# Altium PCB PCB.pcbdoc
Units mm, origin at the board's own origin, x right, y up, seen from the top; angles counter-clockwise.
Board outline 58.46 x 127.11 mm, 2 copper layers (Top Layer, Bottom Layer); 33 components, 53 nets, 160 pads, 40 vias.
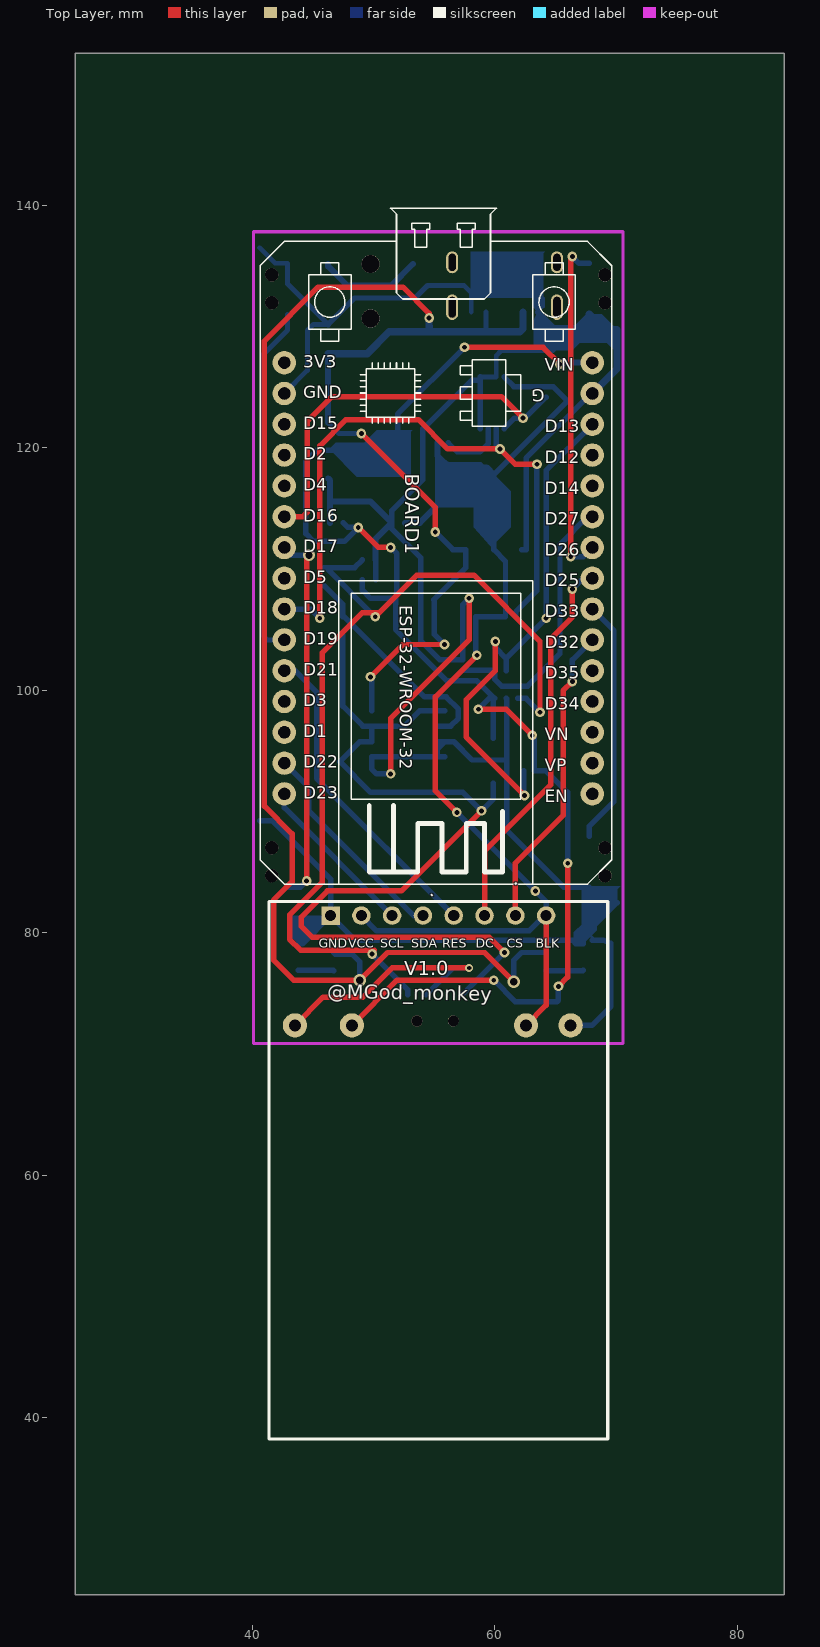
[diagram p0: Top Layer view]
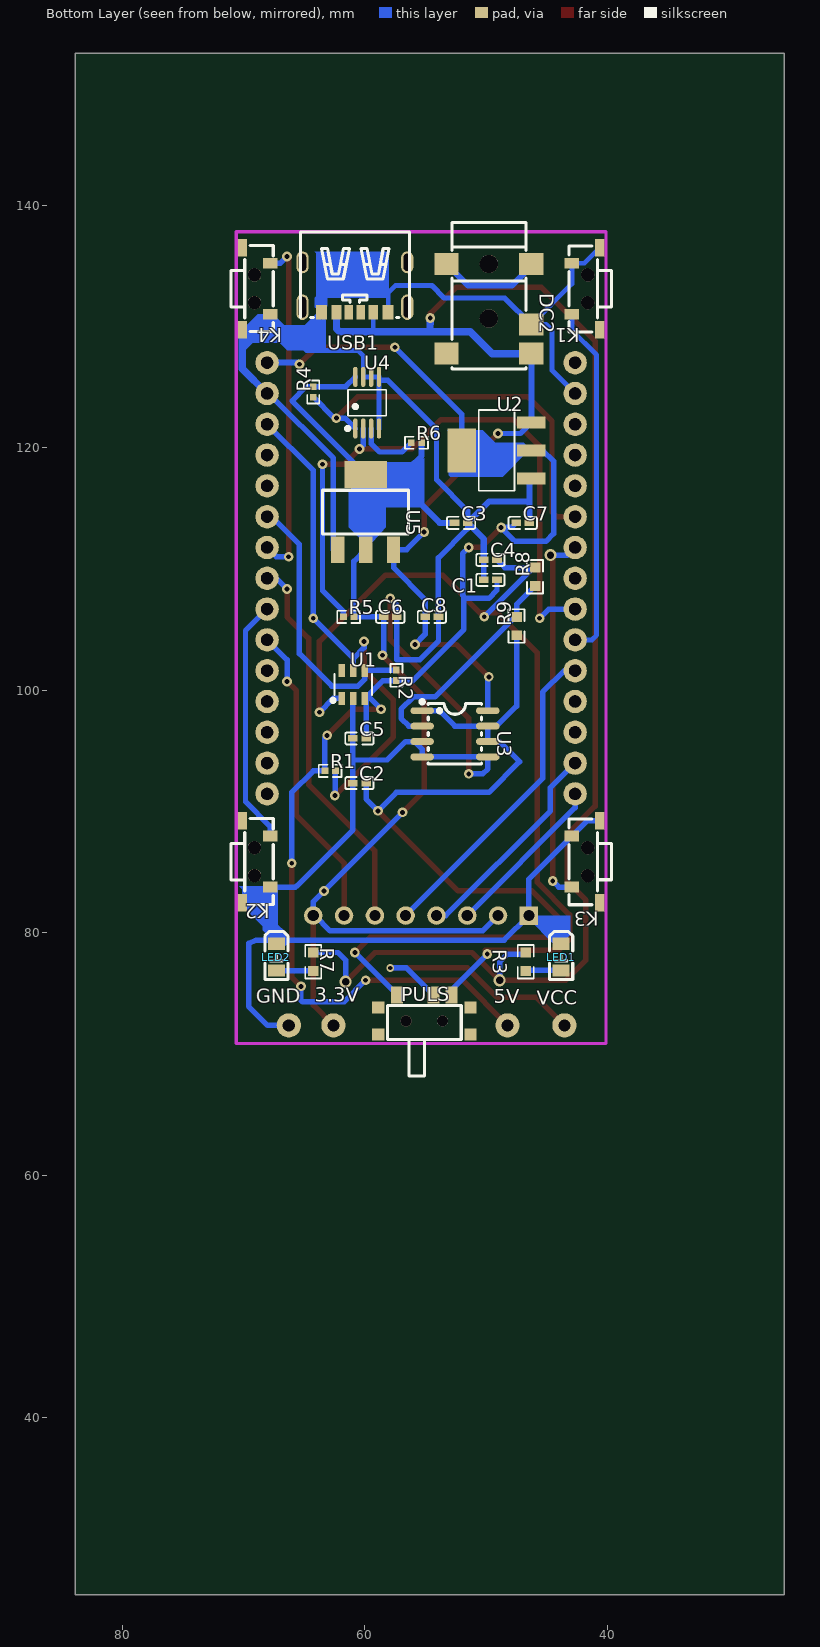
[diagram p1: Bottom Layer view, seen from below]

## Layer stack, top to bottom
Top Layer: signal copper (thickness not stored)
Dielectric: dielectric 0.32, FR-4, Dk 4.8
Bottom Layer: signal copper (thickness not stored)

## Board outline
83.856,25.4 25.4,25.4 25.4,152.514 83.856,152.514

## Components (designator, comment, footprint, x,y, rotation, side; value= is the part's Value field where it differs from the comment)
. "1.44TFT128X128" 1.44TFT128X128 46.45,81.407 r0 top
BOARD1 "ESP32DEVKITV1" ESP32-DEVKITV1 42.64,127 r270 top
C1 "100nF" C0402 49.625,109.093 r180 bottom
C2 "100nF" C0402 60.42,92.329 r0 bottom
C3 "100nF" C0402 52.038,113.792 r0 bottom
C4 "100nF" C0402 49.625,110.744 r0 bottom
C5 "100nF" C0402 60.42,96.012 r0 bottom
C6 "100nF" C0402 57.88,106.045 r180 bottom
C7 "100nF" C0402 46.958,113.792 r0 bottom
C8 "100nF" C0402 54.451,106.045 r180 bottom
DC2 "DC-098-165A" DC-IN-TH_DC-098-165A 49.752,131.445 r90 bottom
K1 "KH-3635-CAJ" SW-SMD_KH-3635-CAJ 41.751,133.096 r270 bottom
K2 "KH-3635-CAJ" SW-SMD_KH-3635-CAJ 68.929,85.852 r90 bottom
K3 "KH-3635-CAJ" SW-SMD_KH-3635-CAJ 41.751,85.852 r270 bottom
K4 "KH-3635-CAJ" SW-SMD_KH-3635-CAJ 68.929,133.096 r90 bottom
LED1 "17-21SYGC/S530-E3/TR8" LED0805-RD 43.783,77.978 r90 bottom
LED2 "17-21SURC/S530-A2/TR8" LED0805-RD 67.278,77.978 r90 bottom
PULS "SK-3296S-01-L1" SW-SMD_3P-P1.50_L2.7-W6.6 55.073,73.238 r0 bottom
R1 "10K" R0402 62.833,93.345 r0 bottom
R2 "10K" R0402 57.372,101.219 r90 bottom
R3 "10K" R0603 46.704,77.597 r270 bottom
R4 "4.7K" R0402 64.23,124.587 r270 bottom
R5 "4.7K" R0402 61.309,106.045 r0 bottom
R6 "4.7K" R0402 55.721,120.396 r0 bottom
R7 "100K" R0603 64.23,77.597 r270 bottom
R8 "10K" R0603 45.942,109.347 r270 bottom
R9 "100K" R0603 47.466,105.283 r270 bottom
U1 "MCP4726A0T-E/CH" SOT-23-6_L2.9-W1.6-P0.95-LS2.8-BL 60.928,100.457 r0 bottom
U2 "AMS1117-5.0_C473812" SOT-223-3_L6.5-W3.4-P2.30-LS7.0-BR 49.117,119.761 r0 bottom
U3 "LM358DT" SOIC-8_L5.0-W4.0-P1.27-LS6.0-BL 52.546,96.393 r90 bottom
U4 "TMP75AIDGKR" VSSOP-8_L3.0-W3.0-P0.65-LS5.0-BL 59.785,123.698 r0 bottom
U5 "AMS1117-3.3_C347222" SOT-223_L6.7-W3.5-P2.30-BR 59.912,114.681 r90 bottom
USB1 "KH-TYPE-C-6P" TYPE-C-SMD_TYPE-C-31-M-16 60.801,133.223 r180 bottom

## Footprints (in the part's own frame and the unit in brackets; to place one, negate y for a bottom-side part, rotate by r counter-clockwise, add the part's x,y. Pads: shape width x height; smd on the part's side, far side on the other; paste and mask are expansions set on the pad)
1.44TFT128X128 [mil]
  rect 60x60 hole 36: 1(0,0)
  round 60 hole 36: 2(100,0) 3(200,0) 4(300,0) 5(400,0) 6(500,0) 7(600,0) 8(700,0)
  silkscreen extent -200,-1700 900,45
C0402 [mm]
  rect 0.79x0.54 smd: 1(0.545,0) 2(-0.545,0)
  silkscreen extent -1.17,-0.5 1.17,0.5
DC-IN-TH_DC-098-165A [mm]
  rect 1.8x2 smd: 1(-3.7,-3.5) 2(-1.3,-3.5) 3(-3.7,3.5) 4(3.7,-3.5) 4(3.7,3.5)
  round 1.5 hole 1.5 unplated: ""(-0.8,0) ""(3.7,0)
  silkscreen extent -4.95,-3.05 7.11,3.05
ESP32-DEVKITV1 [mil]
  round 76 hole 39.36: 3V3(0,0) D1(1200,0) D2(300,0) D3(1100,0) D4(400,0) D5(700,0) D12(300,1000) D13(200,1000) D14(400,1000) D15(200,0) D16(500,0) D17(600,0) D18(800,0) D19(900,0) D21(1000,0) D22(1300,0) D23(1400,0) D25(700,1000) D26(600,1000) D27(500,1000) D32(900,1000) D33(800,1000) D34(1100,1000) D35(1000,1000) EN(1400,1000) GND(100,1000) GND@1(100,0) VIN(0,1000) VN(1200,1000) VP(1300,1000)
  silkscreen extent -502,-79 1693,1063
LED0805-RD [mm]
  rect 1x1.4 smd: 1(1.1,0) 2(-1.1,0)
  silkscreen extent -1.85,-0.95 2.1,0.95
R0402 [mm]
  rect 0.566x0.54 smd: 1(0.433,0) 2(-0.433,0)
  silkscreen extent -0.94,-0.5 0.94,0.5
R0603 [mm]
  rect 0.806x0.864 smd: 1(0.753,0) 2(-0.753,0)
  silkscreen extent -1.39,-0.66 1.39,0.66
SOIC-8_L5.0-W4.0-P1.27-LS6.0-BL [mil]
  oval 22.38x76.78 smd: 1(75,106.5) 2(25,106.5) 3(-25,106.5) 4(-75,106.5) 5(-75,-106.5) 6(-25,-106.5) 7(25,-106.5) 8(75,-106.5)
  silkscreen extent -98,-87 110,112
SOT-23-6_L2.9-W1.6-P0.95-LS2.8-BL [mm]
  rect 0.532x1.072 smd: 1(0.95,1.149) 2(0,1.149) 3(-0.95,1.149) 4(-0.95,-1.149) 5(0,-1.149) 6(0.95,-1.149)
  silkscreen extent -1.54,-0.89 1.82,1.45
SOT-223-3_L6.5-W3.4-P2.30-LS7.0-BR [mm]
  rect 2.34x0.98 smd: 1(-2.87,2.3) 2(-2.87,0) 3(-2.87,-2.3)
  rect 2.34x3.6 smd: 4(2.87,0)
  silkscreen extent -1.47,-3.33 1.47,3.33
SOT-223_L6.7-W3.5-P2.30-BR [mm]
  rect 2.2x1.1 smd: 1(-3.099,2.3) 2(-3.099,0) 3(-3.099,-2.3)
  rect 2.2x3.5 smd: 4(3.099,0)
  silkscreen extent -1.8,-3.55 1.8,3.55
SW-SMD_3P-P1.50_L2.7-W6.6 [mm]
  rect 1x1 smd: 0(-3.8,-0.575) 0(-3.8,1.625) 0(3.8,-0.575) 0(3.8,1.625)
  rect 1x1.4 smd: 1(2.25,-1.625) 2(-0.75,-1.625) 3(-2.25,-1.625)
  round 0.9 hole 0.9 unplated: ""(-1.5,0.525) ""(1.5,0.525)
  silkscreen extent -3.05,-0.75 3.05,5.05
SW-SMD_KH-3635-CAJ [mm]
  rect 0.9x1.2 smd: 1(2.1,-1.15) 2(-2.1,-1.15)
  rect 1.45x0.8 smd: 3(3.375,1.15) 4(-3.375,1.15)
  round 1.1 hole 1.1 unplated: ""(-1.15,0.15) ""(1.15,0.15)
  silkscreen extent -3.53,-1.4 3.55,2.1
TYPE-C-SMD_TYPE-C-31-M-16 [mm]
  oval 1x2.1 hole 0.6 slot 1.7 at 90 deg: 1(4.32,-1.65) 2(-4.32,-1.65)
  oval 1x1.8 hole 0.6 slot 1.4 at 90 deg: 3(4.32,2.05) 4(-4.32,2.05)
  rect 0.7x1.2 smd: A5(0.5,-2.05) B5(-0.5,-2.05)
  rect 0.8x1.2 smd: A9(-1.52,-2.05) B9(1.52,-2.05)
  rect 0.9x1.2 smd: A12(-2.75,-2.05) B12(2.75,-2.05)
  silkscreen extent -4.5,-2.49 4.5,4.55
VSSOP-8_L3.0-W3.0-P0.65-LS5.0-BL [mm]
  oval 0.364x1.662 smd: 1(0.975,2.131) 2(0.325,2.131) 3(-0.325,2.131) 4(-0.975,2.131) 5(-0.975,-2.131) 6(-0.325,-2.131) 7(0.325,-2.131) 8(0.975,-2.131)
  silkscreen extent -1.58,-1.07 1.76,2.28

## Free pads (board coordinates)
  round 2 hole 1: 1(43.516,72.349) 2(48.215,72.349) 3(62.566,72.349) 4(66.249,72.349)

## Via types
v1: diameter 0.8, hole 0.4, Top Layer to Bottom Layer, 36 vias
v2: diameter 1, hole 0.6, Top Layer to Bottom Layer, 3 vias
v3: diameter 0.65, hole 0.35, Top Layer to Bottom Layer, 1 vias

## Nets (pads, with @x,y where several pads share a name; then routed paths per layer and width w, separated by ;. In a path a pad name is that pad's centre, name@x,y a point inside that pad or via, vN(x,y) a via of type N, cw(c..) or ccw(c..) an arc to the next point about the centre after c; other vN are vias at no path point)
+3.3V: ..2 ..8 C3.1 C6.2 pad.3 R4.2 R5.2 R6.2 U4.8 U5.2 U5.4 | length 98.3
  Top Layer w0.45: v1(56.864,89.916) 55.086,91.694 55.086,99.441 v1(58.515,102.87) ; pad.3 64.23,74.013 ..8
  Bottom Layer w0.45: ..2 50.26,80.137 62.833,80.137 64.103,81.407 ..8 64.23,82.55 v1(63.341,83.439) v1(56.864,89.916) ; v1(58.515,102.87) 58.425,102.96 C6.2 R5.2 60.876,110.618 U5.2 U5.4 65.983,123.85 64.814,125.019 R4.2 ; U4.8 61.569,125.02 R4.2
  Bottom Layer w0.5: C3.1 53.816,113.792 55.34,115.316 55.34,117.475 56.229,118.364 ; R6.2 55.288,119.305 56.229,118.364 ; U5.4 59.328,118.364 56.229,118.364
+5V: BOARD1.VIN C1.1 C5.2 C7.1 pad.2 R1.1 R2.2 U1.3 U2.2 U2.4 | length 120.8
  Top Layer w0.45: pad.2 51.939,76.073 v1(59.912,76.073) ; v1(48.736,113.411) 50.387,111.76 v1(51.403,111.76) ; v1(57.499,128.27) 63.976,128.27 v1(65.373,126.873) ; v1(58.642,98.425) 60.928,98.425 v1(63.087,96.266) ; v1(65.246,75.565) 66.008,76.327 v1(66.008,85.725)
  Bottom Layer w0.45: C7.1 47.884,113.411 v1(48.736,113.411) 47.593,112.268 45.053,112.268 44.418,112.903 44.418,118.872 45.307,119.761 U2.2 U2.4 51.987,122.758 v1(57.499,128.27) ; C1.1 49.08,108.241 49.752,107.569 51.657,107.569 51.911,107.823 51.911,111.252 v1(51.403,111.76) ; 51.809,107.696 51.809,105.004 56.026,100.787 R2.2 ; R2.2 58.5,100.786 U1.3 ; v1(58.642,98.425) 59.525,99.308 U1.3 ; C5.2 59.875,99.205 U1.3 ; v1(59.912,76.073) 61.69,74.295 65.119,74.295 65.246,74.422 v1(65.246,75.565) ; v1(63.087,96.266) 63.266,96.087 R1.1 ; R1.1@63.265,93.345 64.23,93.345 66.008,91.567 v1(66.008,85.725)
  Bottom Layer w0.5: v1(65.373,126.873) 65.5,127 BOARD1.VIN
BOARD1_3V3: BOARD1.3V3
BOARD1_D1: BOARD1.D1
BOARD1_D2: BOARD1.D2
BOARD1_D3: BOARD1.D3
BOARD1_D4: BOARD1.D4
BOARD1_D5: BOARD1.D5
BOARD1_D12: BOARD1.D12
BOARD1_D14: BOARD1.D14
BOARD1_D15: BOARD1.D15
BOARD1_D34: BOARD1.D34
BOARD1_D35: BOARD1.D35
BOARD1_EN: BOARD1.EN
BOARD1_VN: BOARD1.VN
BOARD1_VP: BOARD1.VP
CS: ..7 BOARD1.D32 | length 25.4
  Top Layer w0.45: ..7 61.69,85.725 65.627,89.662 65.627,99.949 v1(66.389,100.711)
  Bottom Layer w0.45: v1(66.389,100.711) 66.389,102.489 BOARD1.D32
DC: ..6 BOARD1.D25 | length 31.9
  Top Layer w0.45: ..6 59.15,86.741 64.611,92.202 64.611,104.267 66.389,106.045 v1(66.389,108.331)
  Bottom Layer w0.45: v1(66.389,108.331) 67.278,109.22 BOARD1.D25
DC2_3: DC2.3
DC2_4: DC2.4 | length 8.6
  Bottom Layer w0.5: DC2.4@46.252,135.146 46.252,134.945 47.847,133.35 51.456,133.35 DC2.4@53.252,135.146
GND: ..1 BOARD1.GND BOARD1.GND@1 C1.2 C2.1 C3.2 C4.1 C5.1 C6.1 C7.2 C8.1 DC2.2 K1.2 K1.4 K2.2 K2.4 K3.2 K3.4 K4.2 K4.4 LED1.1 LED2.1 pad.4 U1.2 U2.1 U3.3 U3.4 U3.5 U4.4 U4.5 U4.6 U4.7 U5.1 USB1.A12 USB1.B12 | length 239.5
  Top Layer w0.45: v1(51.403,93.091) 51.403,97.663 57.88,104.14 v1(57.88,107.569)
  Bottom Layer w0.4: K1.4 41.876,135.196 K1.2 42.901,133.496 DC2.2 45.023,130.145 44.545,129.667 44.545,126.365 42.64,124.46 ; 54.451,133.35 57.461,133.35 58.05,132.758 ; USB1.B12 58.051,132.759 58.896,133.604 62.579,133.604 63.595,132.588 63.551,132.544 USB1.A12 ; U4.5 U4.6 U4.7 60.11,127.579 60.547,128.016 64.799,128.016 K4.2
  Bottom Layer w0.45: K3.4 41.626,89.227 K3.2 46.45,84.403 ..1 ; LED1.1 44.121,79.078 ..1 ; DC2.2 48.441,132.334 53.435,132.334 54.451,133.35 ; C1.2 C4.1 ; v1(51.403,93.091) 50.26,93.091 49.841,93.51 U3.5 U3.4@55.886,94.488 ; C8.1@53.905,106.045 53.905,104.051 55.467,102.489 57.334,102.489 C6.1@57.334,106.045 ; C8.1 53.906,110.908 51.493,113.321 C3.2 51.493,114.771 54.07,117.348 54.07,121.539 58.078,125.547 U4.5@58.81,125.547 ; U3.4 55.251,95.123 U3.3@55.886,95.758 ; U3.3 56.61,95.758 58.134,94.234 60.965,94.234 ; C6.1 57.335,107.024 v1(57.88,107.569) ; U4.4 U4.5 ; U1.2 60.965,99.271 C5.1 C2.1 60.965,88.482 65.627,83.82 65.695,83.752 K2.2 ; U5.1 62.579,111.582 62.579,119.126 67.913,124.46 67.913,124.587 BOARD1.GND ; USB1.A12 65.124,129.6 66.383,129.6 ; pad.4 67.999,72.349 69.564,73.914 69.564,79.108 68.929,79.375 68.04,79.375 ; K2.4 67.278,79.676 LED2.1 66.686,79.078 66.389,79.375 48.482,79.375 ..1
  Bottom Layer w0.5: U2.1 46.413,117.295 C7.2 ; 46.413,115.536 49.749,115.536 C3.2 50.17,112.469 C4.1
  Bottom Layer w0.6: K4.2@67.778,130.995 69.053,129.72 K4.4 70.08,126.5 BOARD1.GND
K1: BOARD1.D19 K1.1 | length 29.3
  Bottom Layer w0.4: BOARD1.D19 41.243,104.14 40.862,104.521 40.862,127.635 42.902,129.675 K1.1
K1_3: K1.3
K2: BOARD1.D33 K2.1 | length 20.3
  Bottom Layer w0.45: K2.1 67.779,88.766 69.818,90.805 69.818,104.902 BOARD1.D33
K2_3: K2.3
K3: BOARD1.D17 K3.1 | length 31
  Top Layer w0.45: v1(44.481,84.265) 44.481,110.935 v2(44.672,111.125)
  Bottom Layer w0.45: BOARD1.D17 43.275,111.125 v2(44.672,111.125) ; K3.1 43.969,83.752 v1(44.481,84.265)
K3_3: K3.3
K4: BOARD1.D26 K4.1 | length 28.5
  Top Layer w0.45: v1(66.262,110.998) 66.262,135.636 v1(66.389,135.763)
  Bottom Layer w0.45: v1(66.262,110.998) 67.278,110.998 BOARD1.D26 ; v1(66.389,135.763) 66.956,135.196 K4.1
K4_3: K4.3
LED2_2: LED2.2 R7.1 | length 3.1
  Bottom Layer w0.45: R7.1 67.244,76.844 LED2.2
PULS_0: PULS.0
R3_1: LED1.2 R3.1 | length 2.9
  Bottom Layer w0.45: LED1.2 46.67,76.878 R3.1@46.704,76.844
RES: ..5 BOARD1.D21 | length 26.5
  Bottom Layer w0.45: BOARD1.D21 43.529,101.6 45.307,99.822 45.307,92.71 ..5
S$1051: 
SCL_DAC: BOARD1.D13 R1.2 U1.5 | length 42.8
  Top Layer w0.45: v1(60.039,104.013) 60.039,101.6 57.626,99.187 57.626,96.139 v1(62.452,91.313)
  Bottom Layer w0.45: v1(60.039,104.013) 60.039,103.505 60.928,102.616 ; U1.5 60.928,102.616 ; R1.2 62.4,91.365 v1(62.452,91.313) ; BOARD1.D13 64.23,118.11 v1(64.23,105.918) 60.928,102.616
SCL_OLED: ..3 BOARD1.D23 | length 13.7
  Bottom Layer w0.45: BOARD1.D23 42.64,90.297 ..3
SCL_TMP: BOARD1.D18 R5.1 U4.2 | length 52.9
  Top Layer w0.45: v1(45.561,105.918) 45.561,120.142 47.72,122.301 53.689,122.301 56.102,119.888 v1(60.42,119.888) 61.69,118.618 v1(63.468,118.618)
  Bottom Layer w0.45: BOARD1.D18 44.799,106.68 v1(45.561,105.918) ; U4.2 60.11,120.198 v1(60.42,119.888) ; R5.1 61.742,106.478 63.468,108.204 v1(63.468,118.618)
SDA_DAC: BOARD1.D27 R2.1 U1.4 | length 22.7
  Bottom Layer w0.45: R2.1 59.932,101.652 U1.4 ; U1.4 59.978,100.899 60.547,100.33 62.706,100.33 65.373,102.997 65.373,107.442 65.373,112.014 67.659,114.3 BOARD1.D27
SDA_OLED: ..4 BOARD1.D22 | length 17.8
  Bottom Layer w0.45: BOARD1.D22 44.672,91.948 44.672,90.043 53.308,81.407 ..4
SDA_TMP: BOARD1.D16 R4.1 U4.1 | length 33.5
  Top Layer w0.45: BOARD1.D16 44.164,114.3 44.545,114.681 44.545,122.174 46.577,124.206 60.547,124.206 v1(62.325,122.428)
  Bottom Layer w0.45: U4.1 61.621,122.428 v1(62.325,122.428) 62.504,122.428 R4.1
U1_6: U1.6
U3_2: R8.1 R9.2 U3.2 | length 18.6
  Bottom Layer w0.45: R8.1 47.466,107.07 R9.2 ; R9.2 47.601,106.037 54.197,99.441 55.975,99.441 56.991,98.425 56.991,97.663 56.356,97.028 U3.2
U4_3: R6.1 U4.3 | length 5.1
  Bottom Layer w0.45: R6.1 56.916,119.634 58.769,119.634 59.46,120.325 U4.3
USB1_1: USB1.1
USB1_2: USB1.2
USB1_3: USB1.3
USB1_4: USB1.4
USB1_A5: USB1.A5
USB1_B5: USB1.B5
VCC: C8.2 DC2.1 R3.2 R7.2 U2.3 U3.8 U5.3 USB1.A9 USB1.B9 | length 163.5
  Top Layer w0.45: v1(48.99,121.158) 55.086,115.062 v1(55.086,113.03) ; v1(49.752,101.092) 52.419,103.759 v1(55.848,103.759) ; v1(54.578,130.683) 54.578,131.064 52.419,133.223 45.434,133.223 40.989,128.778 40.989,90.424 43.275,88.138 43.275,84.201 41.751,82.677 41.751,77.724 43.402,76.073 v2(48.863,76.073) 51.149,78.359 59.15,78.359 v2(61.563,75.946)
  Bottom Layer w0.4: 59.281,129.54 USB1.B9
  Bottom Layer w0.45: U2.3 47.15,121.158 v1(48.99,121.158) ; R3.2 46.822,78.232 48.228,78.232 48.863,77.597 v2(48.863,76.073) ; v1(49.752,101.092) 49.841,101.003 U3.8 ; v1(55.086,113.03) 56.534,111.582 U5.3 57.612,110.095 54.959,107.442 54.996,107.405 C8.2 54.996,104.611 v1(55.848,103.759) ; v2(61.563,75.946) 61.563,77.724 62.198,78.359 R7.2
  Bottom Layer w0.5: U2.3@46.247,122.06 DC2.1
  Bottom Layer w0.6: DC2.1 49.481,127.745 51.276,129.54 62.071,129.54 62.321,129.79 USB1.A9 ; v1(54.578,130.683) 54.601,129.54
VIN: C2.2 PULS.1 R9.1 U3.1 U3.6 U3.7 | length 78
  Top Layer w0.45: v1(58.896,90.043) 52.292,83.439 46.196,83.439 44.037,81.28 44.037,80.518 44.926,79.629 59.531,79.629 v1(60.801,78.359)
  Bottom Layer w0.45: R9.1 47.466,98.679 49.117,97.028 U3.7 ; U3.1@55.886,98.298 53.816,98.298 52.546,97.028 U3.7 ; PULS.1 57.323,74.881 v1(60.801,78.359) ; C2.2 59.875,91.022 v1(58.896,90.043) 57.372,91.567 49.752,91.567 47.212,94.107 48.863,95.758 U3.6 U3.7
VOUT: pad.1 PULS.2 | length 20.8
  Top Layer w0.45: pad.1 45.843,74.676 49.117,74.676 51.53,77.089 v3(57.88,77.089)
  Bottom Layer w0.45: PULS.2 56.549,77.089 v3(57.88,77.089)
VOUT_1: C4.2 PULS.3 R8.2 U1.1 | length 77.3
  Top Layer w0.45: v1@50.069,78.55 43.973,78.55 43.084,79.439 43.084,81.471 45.751,84.138 45.751,103.061 49.053,106.363 v1@50.323,106.363 ; v1(50.133,106.045) 53.562,109.474 58.261,109.474 63.722,104.013 v1(63.722,98.171)
  Bottom Layer w0.45: C4.2 48.436,110.1 R8.2 46.078,110.1 v1(50.133,106.045) ; v1(49.879,78.232) 52.823,75.288 PULS.3 ; U1.1 62.585,99.308 v1(63.722,98.171)
pads on no net: DC2. K1. K2. K3. K4. PULS.

## Other copper
Bottom Layer:
  region net GND: 46.45,81.407 44.121,79.078 43.783,79.078 43.021,79.84 43.021,81.407
  region net GND: 67.278,80.772 66.516,80.01 66.516,79.375 66.813,79.078 67.278,79.078 68.398,80.198 68.398,80.796
  region net GND: 66.516,79.502 66.643,79.629 66.668,79.629 67.485,80.311 67.151,80.645 67.151,83.566 67.405,83.82 70.326,83.82 70.079,83.573 70.079,82.477 67.485,80.311 68.167,79.629 66.668,79.629 66.516,79.502
  region net GND: 63.551,131.173 63.087,131.637 63.087,132.334 63.214,132.461 63.976,132.461 64.103,132.334 64.103,131.572
  region net GND: 58.051,132.759 58.007,132.803 58.007,136.144 64.103,136.144 63.976,136.017 63.976,132.715 63.976,132.334
  region net GND: 63.468,130.556 63.849,130.556 63.849,128.27 63.341,128.27
  region net GND: 63.214,130.556 63.214,128.016 63.976,128.016 63.551,128.441 63.551,131.173
  region net GND: 63.551,131.173 63.595,131.129 63.595,128.016 64.799,128.016 65.124,128.342 65.124,129.6
  region net GND: 63.551,131.173 64.799,129.925 64.799,128.016 66.008,129.225 66.008,129.6 65.373,129.6
  region net GND: 64.644,130.081 66.863,130.081 67.779,130.996 66.863,130.081 66.229,129.446 65.278,129.446 64.644,130.081
  region net GND: 67.779,130.996 67.779,130.063 70.08,127.762 70.08,129.721 70.079,129.721 68.804,130.996
  region net GND: 63.551,132.334 63.551,132.632 62.579,133.604 58.896,133.604 58.896,133.306 58.051,132.461 58.051,132.334
  region net +3.3V: 55.086,119.126 55.086,115.062 59.785,115.062 59.912,114.935 59.912,117.78
  region net +3.3V: 55.784,118.809 58.883,118.809 59.912,117.78
  region net +3.3V: 59.912,111.582 59.912,112.014 61.309,113.411 61.309,116.383 59.912,117.78 59.455,117.78 58.261,116.586 58.261,113.411 58.642,113.03
  region net +5V: 46.247,119.761 46.45,119.761 48.609,117.602 52.927,117.602 53.054,117.729 53.054,121.285 53.181,121.412 50.26,121.412 49.244,120.396 46.882,120.396 46.247,119.761
  region net GND: 64.799,128.016 66.389,128.016 68.294,129.921 68.294,130.481 67.779,130.996
  region net GND: 66.262,128.651 68.04,130.175 69.564,128.651 69.818,128.651 70.072,128.397 69.818,128.397 69.564,128.651 66.262,128.651

## Silkscreen, mask and mechanical layers (free items; w line width, h text height)
Top Overlay:
  text "V1.0" at 52.546,76.073 h2.03
  text "@MGod_monkey" at 46.196,74.168 h2.03 r359
Bottom Overlay:
  text "3.3V" at 64.09,73.873 h2.03
  text "5V" at 49.358,73.746 h2.03
  text "GND" at 68.916,73.746 h2.03 r359
  text "VCC" at 45.802,73.619 h2.03

## Text inside footprints (layer, text, board x,y; h text height)
.: Top Overlay "BLK" at 63.367,78.74 h0.76; Top Overlay "CS" at 60.979,78.74 h0.76; Top Overlay "DC" at 58.439,78.74 h0.76; Top Overlay "RES" at 55.645,78.74 h0.76; Top Overlay "SDA" at 53.105,78.74 h0.76; Top Overlay "SCL" at 50.565,78.74 h0.76; Top Overlay "VCC" at 47.898,78.74 h0.76; Top Overlay "GND" at 45.485,78.74 h0.76
BOARD1: Document "ESP32-Devkit V1" at 54.95,98.08 h1.93 r270; Document "ESP32-DEVKITV1" at 38.1,100.64 h1.27 r270; Top Overlay "3V3" at 44.18,126.6 h1.02; Top Overlay "GND" at 44.18,124.06 h1.02; Top Overlay "D15" at 44.18,121.52 h1.02; Top Overlay "D2" at 44.18,118.98 h1.02; Top Overlay "D4" at 44.18,116.44 h1.02; Top Overlay "D16" at 44.18,113.9 h1.02; Top Overlay "D17" at 44.18,111.36 h1.02; Top Overlay "D5" at 44.18,108.82 h1.02; Top Overlay "D18" at 44.18,106.28 h1.02; Top Overlay "D19" at 44.18,103.74 h1.02; Top Overlay "D21" at 44.18,101.2 h1.02; Top Overlay "D3" at 44.18,98.66 h1.02; Top Overlay "D1" at 44.18,96.12 h1.02; Top Overlay "D22" at 44.18,93.58 h1.02; Top Overlay "D23" at 44.18,91.04 h1.02; Top Overlay "VIN" at 64.11,126.33 h1.02; Top Overlay "G" at 64.11,124.806 h1.02 r180; Top Overlay "D13" at 64.11,121.25 h1.02; Top Overlay "D12" at 64.11,118.71 h1.02; Top Overlay "D14" at 64.11,116.17 h1.02; Top Overlay "D27" at 64.11,113.63 h1.02; Top Overlay "D26" at 64.11,111.09 h1.02; Top Overlay "D25" at 64.11,108.55 h1.02; Top Overlay "D33" at 64.11,106.01 h1.02; Top Overlay "D32" at 64.11,103.47 h1.02; Top Overlay "D35" at 64.11,100.93 h1.02; Top Overlay "D34" at 64.11,98.39 h1.02; Top Overlay "VN" at 64.11,95.85 h1.02; Top Overlay "VP" at 64.11,93.31 h1.02; Top Overlay "EN" at 64.11,90.77 h1.02; Top Overlay "ESP-32-WROOM-32" at 52.14,107 h1.02 r270